# EAGLE board VolCon_ENC (EAGLE 6.5.0)
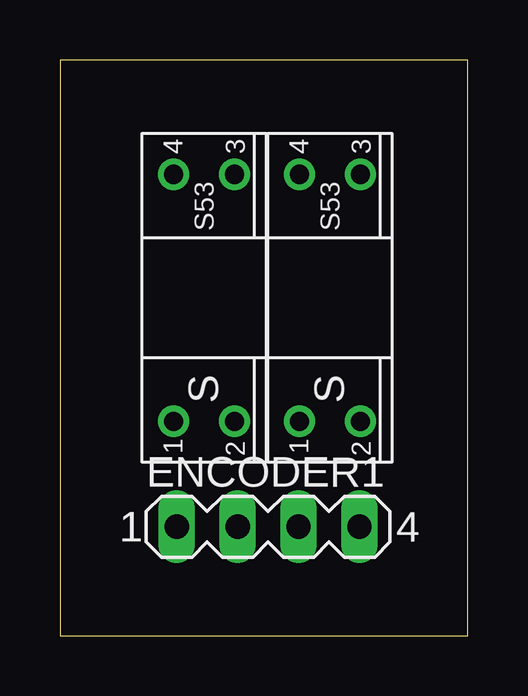
[diagram p0: board, top side]
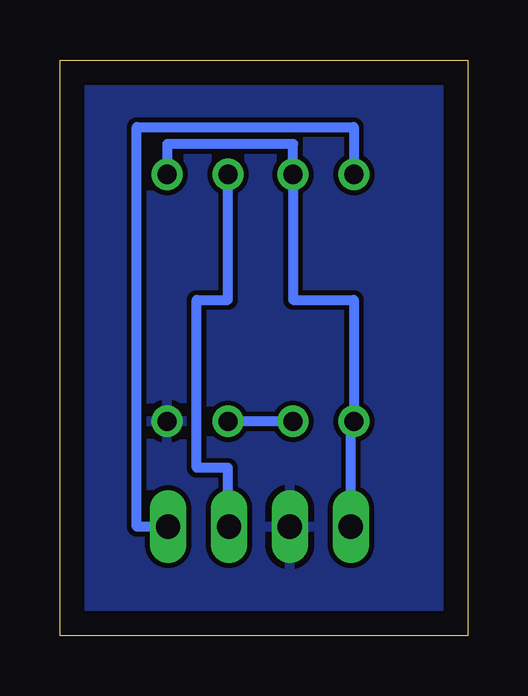
[diagram p1: board, bottom side, seen from below]

Size 17 x 24 mm. Coordinates in mm from the lower left corner, seen from the top.
Outline: 0,0 17,0 17,24 0,24 0,0
Copper layers (1*16): Top 0.035mm / dielectric 1.5mm / Bottom 0.035mm
Design rules "default": minimum track width 10mil, minimum drill 24mil, track to track 8mil, track to pad 8mil, pad to pad 8mil, via to via 8mil, smd to smd 8mil, copper to edge 40mil, drill to drill 8mil, minimum pad ring 10mil, minimum via ring 8mil, stop-mask expansion 4mil, vias tented up to drill 0mil, thermal gap 10mil

## Footprints (pad centres in the part's own frame; a part is rotated, then mirrored left to right if it is on the bottom)
MA04-1 = drill 1.016 long: 1 -3.81,0; 2 -1.27,0; 3 1.27,0; 4 3.81,0
SHARP_S53 = drill 0.8: P$1 -5.15,1.27; P$2 -5.15,-1.27; P$3 5.15,-1.27; P$4 5.15,1.27

## Placement (x,y rotation side)
ENCODER1  ENCODER  [MA04-1]  8.68,4.54 0 top
U$3  SHARP_S53  [SHARP_S53]  6.01,14.08 90 top
U$4  SHARP_S53  [SHARP_S53]  11.26,14.08 90 top

## Library data of the parts
ENCODER1 = con-lstb; OC_FARNELL: unknown; OC_NEWARK: unknown
U$3 U$4 = SHARP_S53

## Nets
ENC_A: ENCODER1.3 U$4.P$4
ENC_B: ENCODER1.4 U$3.P$4
ENC_GND: ENCODER1.2 U$4.P$2
ENC_VCC: ENCODER1.1 U$3.P$1 U$3.P$3 U$4.P$3
N$9: U$3.P$2 U$4.P$1

## Tracks (layer width: path | path; a pad name or v marks a point on that pad's centre or on a via)
ENC_A
  Bottom 0.406: ENCODER1.3 10,3.54 10,7 11.3,7 11.3,14 9.99,14 U$4.P$4
ENC_B
  Bottom 0.406: ENCODER1.4 13.8,4.54 13.8,21.2 4.74,21.2 U$3.P$4
ENC_GND
  pour Bottom: 1,23 16,23 16,1 1,1
ENC_VCC
  Bottom 0.406: ENCODER1.1 4.87,8.93 U$3.P$1 4.74,14 7.28,14 U$3.P$3 7.28,20.5 12.53,20.5 U$4.P$3
N$9
  Bottom 0.406: U$3.P$2 U$4.P$1